# Altium PCB PCB_fishbotv0.1_2022-03-06.pcbdoc
Units mm, origin at the board's own origin, x right, y up, seen from the top; angles counter-clockwise.
Board outline 125.78 x 125.65 mm, 2 copper layers (Top Layer, Bottom Layer); 13 components, 46 nets, 98 pads, 24 vias.
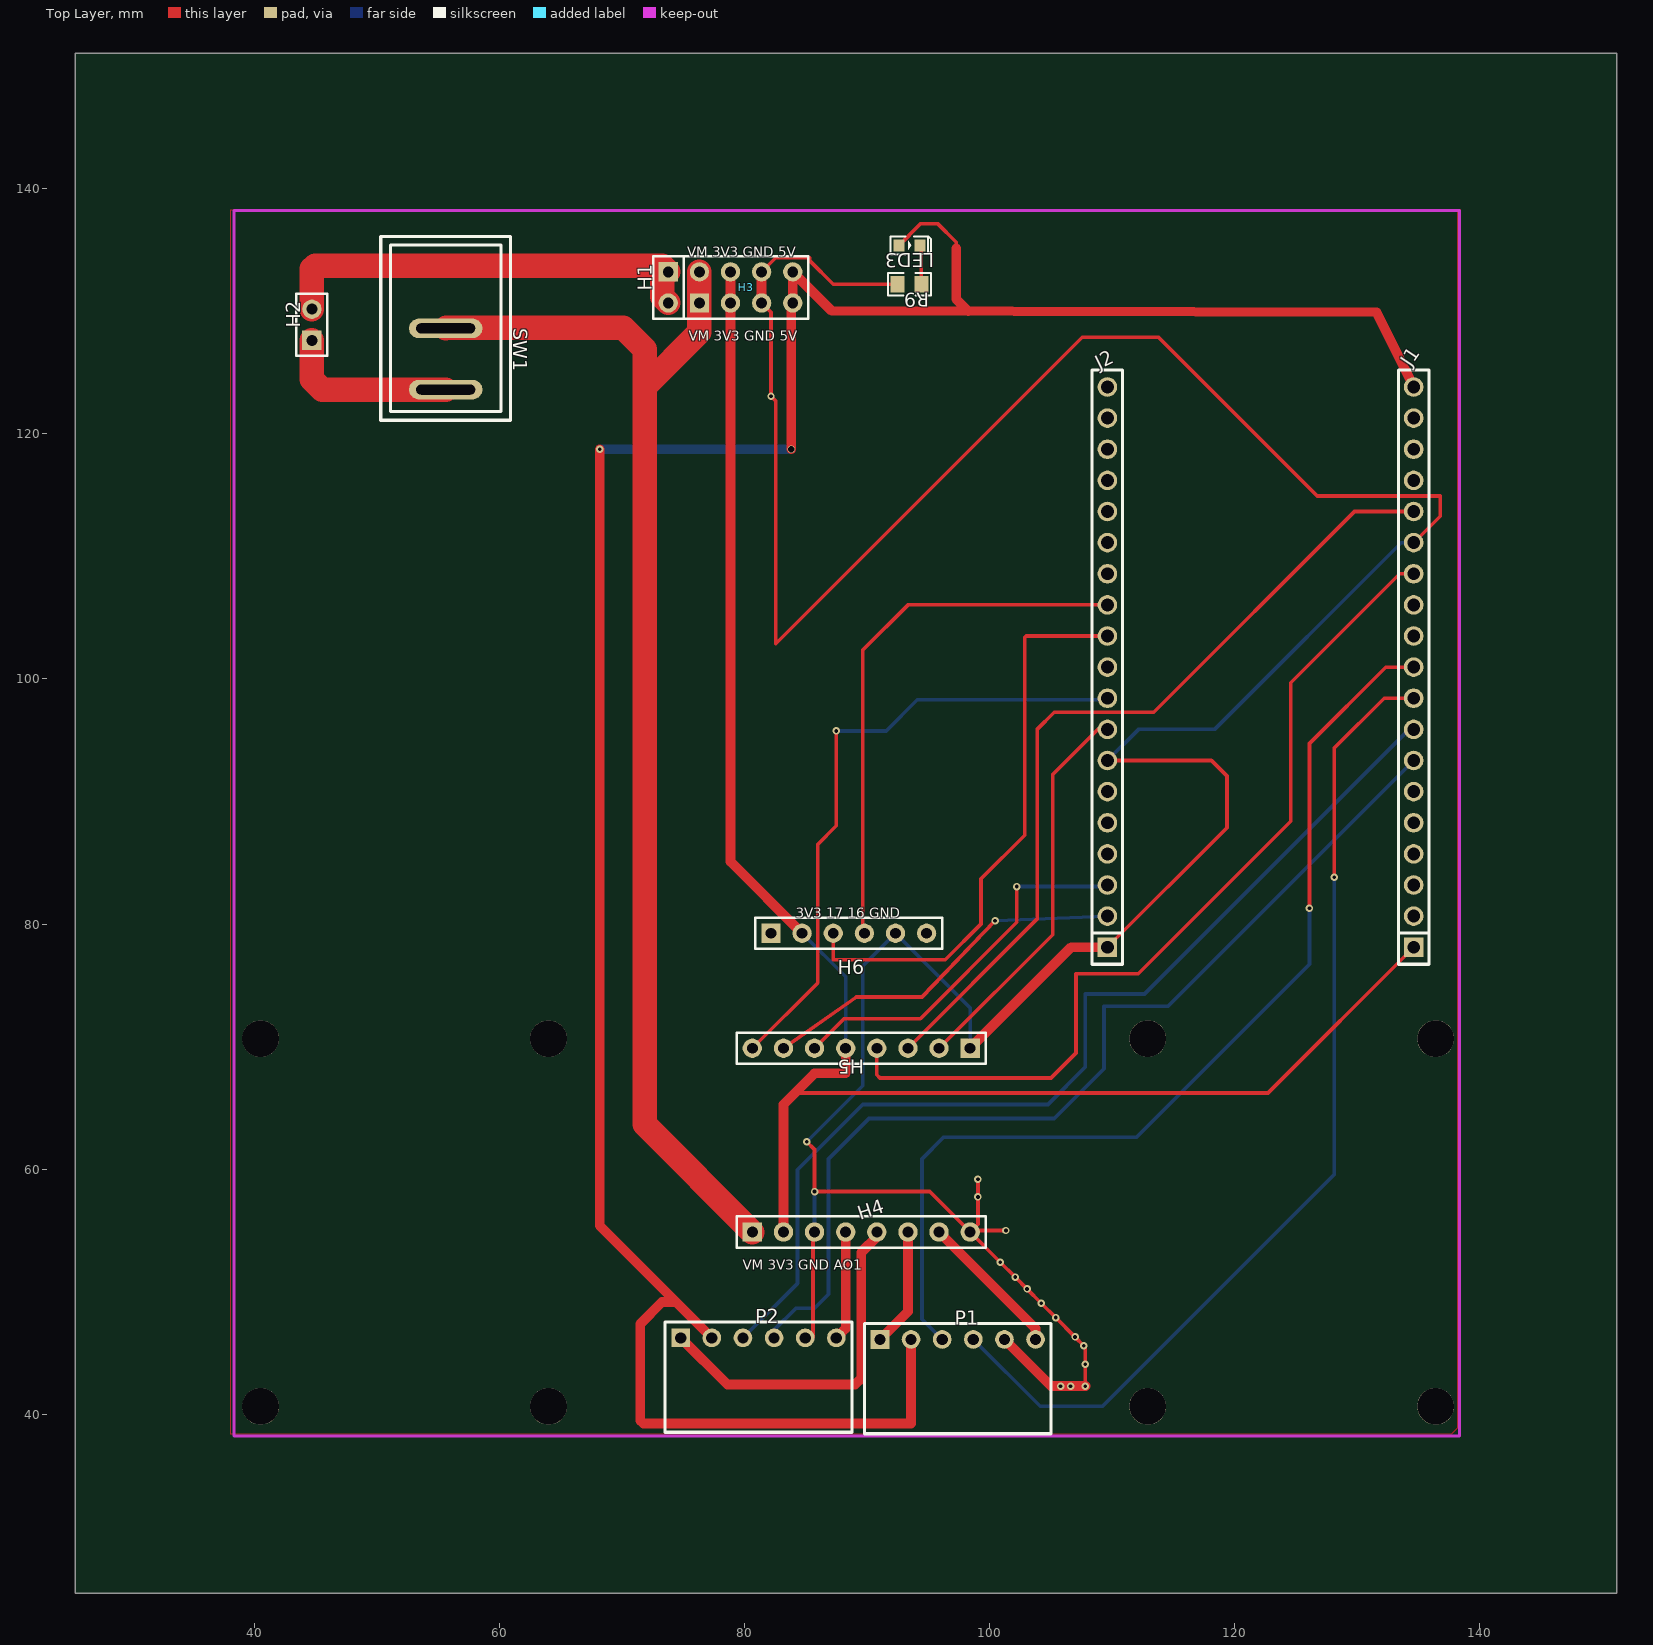
[diagram p0: Top Layer view]
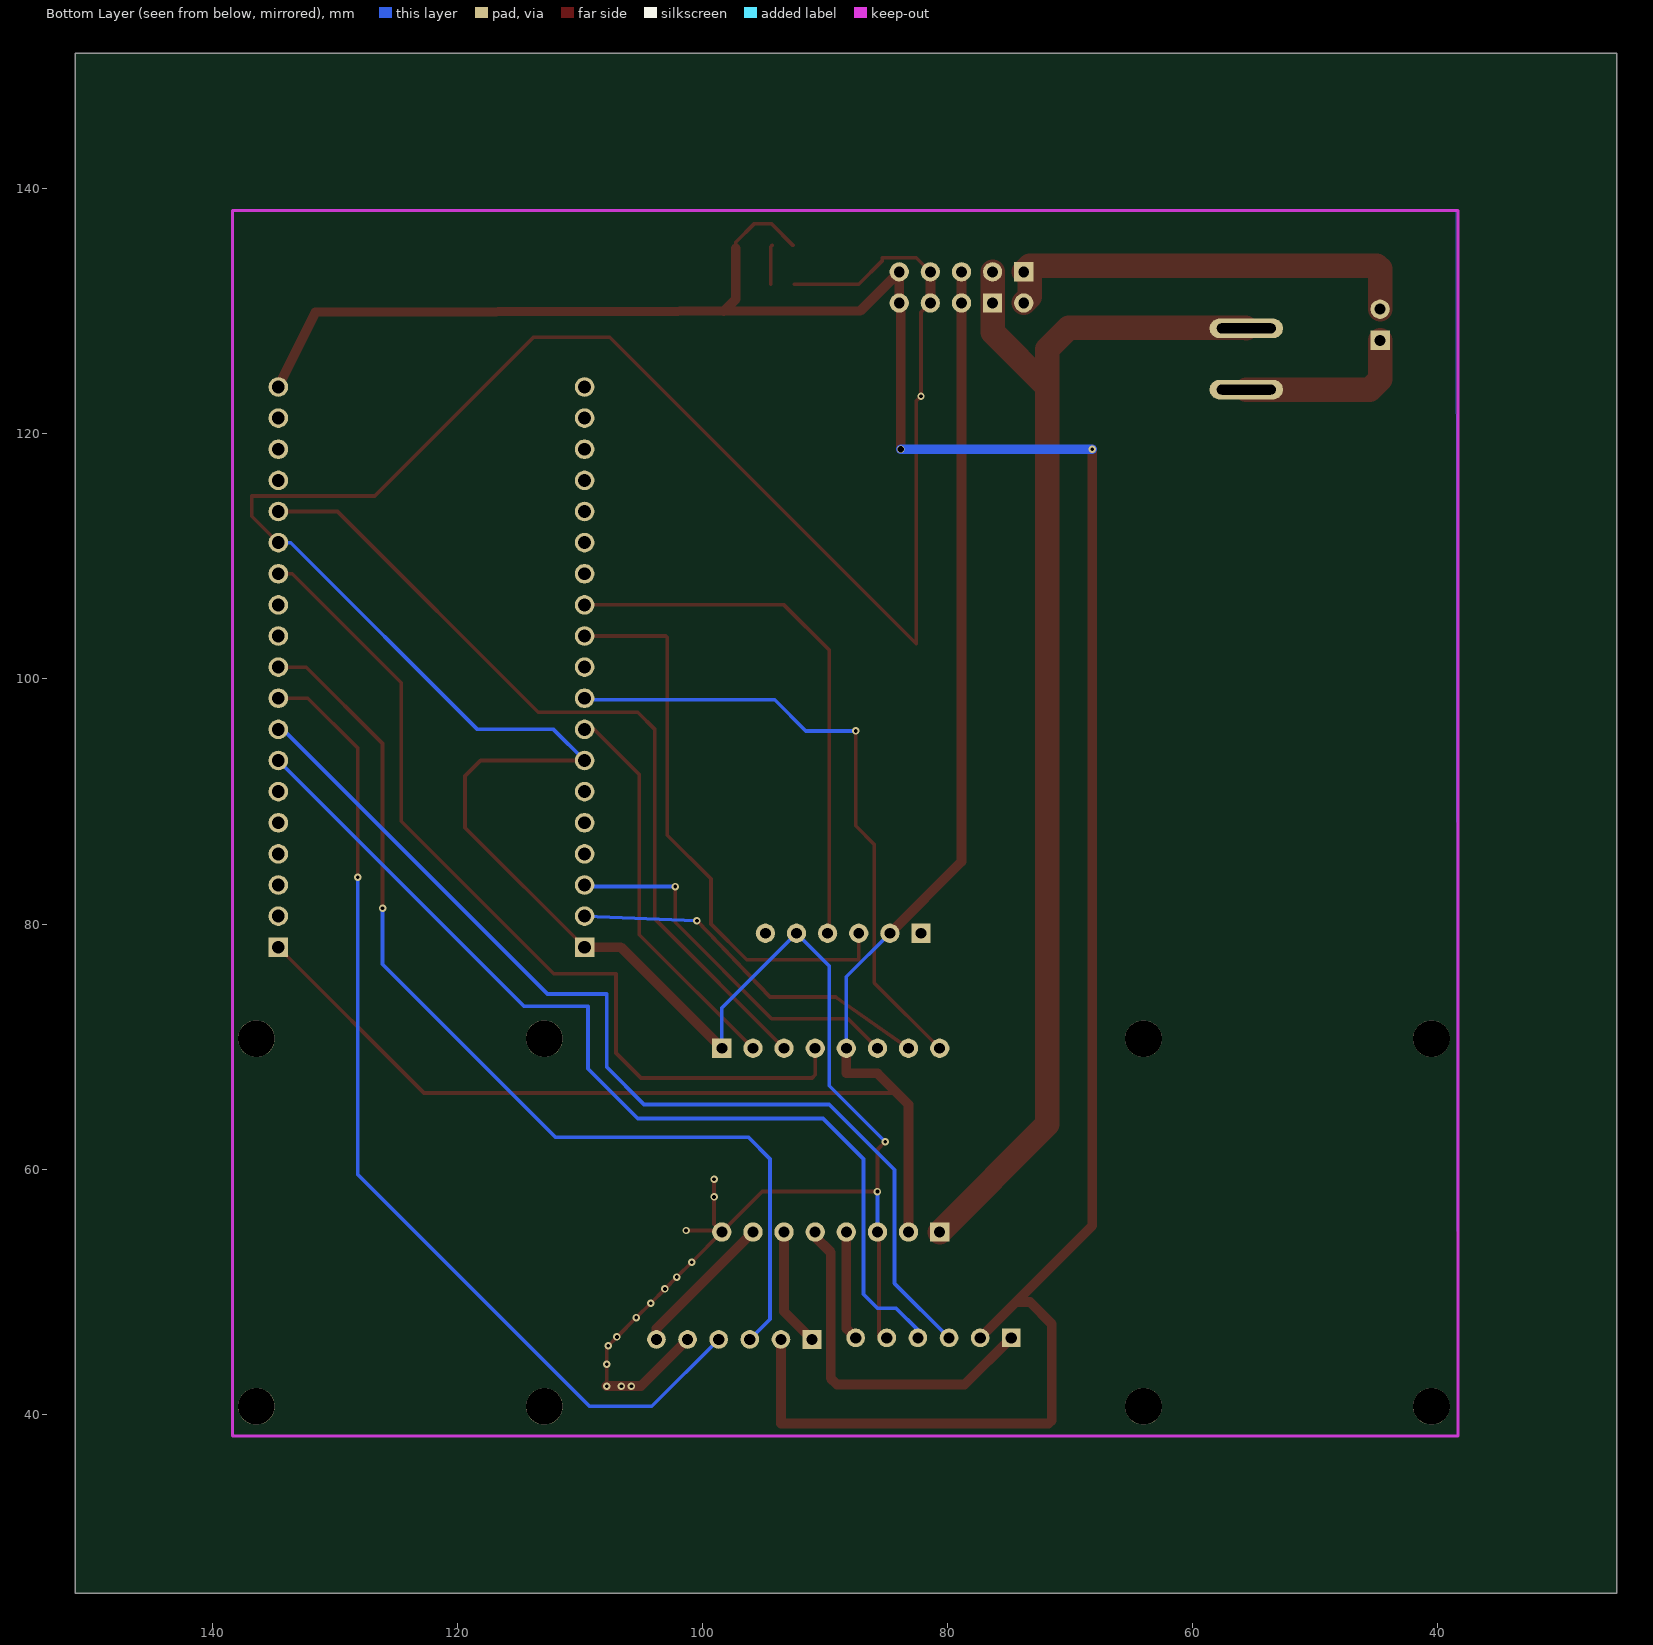
[diagram p1: Bottom Layer view, seen from below]

## Layer stack, top to bottom
Top Layer: signal copper (thickness not stored)
Dielectric: dielectric 0.32, FR-4, Dk 4.8
Bottom Layer: signal copper (thickness not stored)

## Board outline
151.181,25.4 25.4,25.4 25.4,151.054 151.181,151.054

## Components (designator, comment, footprint, x,y, rotation, side; value= is the part's Value field where it differs from the comment)
H1 "HDR-F-2.54_1x2" HDR-F-2.54_1X2 73.787,131.953 r270 top
H2 "PWR" HDR-F-2.54_1X2 44.704,128.905 r90 top
H3 "PWR1" HDR-F-2.54_2X4 80.137,131.953 r0 top
H4 "TB6612-LEFT" HDR-F-2.54_1X8 88.265,54.864 r0 top
H5 "TB6612-RIGHT" HDR-F-2.54_1X8 90.805,69.864 r180 top
H6 "IMU" HDR-F-2.54_1X6 87.249,79.248 r0 top
J1 "Header-Male-2.54_1x19" HDR-TH_19P-P2.54-V-M 134.62,100.965 r90 top
J2 "Header-Male-2.54_1x19" HDR-TH_19P-P2.54-V-M 109.62,100.965 r90 top
LED3 "LED-0603_R" LED0603_RED 93.472,135.382 r0 top
P1 "RIGHT" CONN-TH_6P-P2.54_2.54-6P 97.409,46.101 r0 top
P2 "LEFT" CONN-TH_6P-P2.54_2.54-6P 81.153,46.228 r0 top
R9 "1k" R0805 93.472,132.207 r180 top
SW1 "SS01-BBIWA-RA20-R" SW-TH_SS01-BBIWA-RA20-R 55.626,126.111 r270 top

## Footprints (in the part's own frame and the unit in brackets; to place one, negate y for a bottom-side part, rotate by r counter-clockwise, add the part's x,y. Pads: shape width x height; smd on the part's side, far side on the other; paste and mask are expansions set on the pad)
CONN-TH_6P-P2.54_2.54-6P [mil]
  rect 60x60 hole 36: 1(-250,0)
  round 60 hole 36: 2(-150,0) 3(-50,0) 4(50,0) 5(150,0) 6(250,0)
  silkscreen extent -300,-303 300,51
HDR-F-2.54_1X2 [mil]
  rect 62x62 hole 35: 1(-50,0)
  round 62 hole 35: 2(50,0)
  silkscreen extent -100,-49 100,50
HDR-F-2.54_1X6 [mil]
  rect 62x62 hole 35: 1(-200,0)
  round 62 hole 35: 2(-100,0) 3(0,0) 4(100,0) 5(200,0) 6(300,0)
  silkscreen extent -250,-50 350,50
HDR-F-2.54_1X8 [mil]
  rect 62x62 hole 35: 1(-300,0)
  round 62 hole 35: 2(-200,0) 3(-100,0) 4(0,0) 5(100,0) 6(200,0) 7(300,0) 8(400,0)
  silkscreen extent -350,-50 450,50
HDR-F-2.54_2X4 [mil]
  rect 62x62 hole 35: 1(-150,-50)
  round 62 hole 35: 2(-150,50) 3(-50,-50) 4(-50,50) 5(50,-50) 6(50,50) 7(150,-50) 8(150,50)
  silkscreen extent -200,-100 200,100
HDR-TH_19P-P2.54-V-M [mm]
  rect 1.6x1.6 hole 1.05: 1(-22.86,0)
  round 1.6 hole 1.05: 2(-20.32,0) 3(-17.78,0) 4(-15.24,0) 5(-12.7,0) 6(-10.16,0) 7(-7.62,0) 8(-5.08,0) 9(-2.54,0) 10(0,0) 11(2.54,0) 12(5.08,0) 13(7.62,0) 14(10.16,0) 15(12.7,0) 16(15.24,0) 17(17.78,0) 18(20.32,0) 19(22.86,0)
  silkscreen extent -24.25,-1.25 24.25,1.25
LED0603_RED [mm]
  rect 0.9x1 smd: 1(-0.85,0) 2(0.85,0)
  silkscreen extent -1.54,-0.73 1.75,0.73
R0805 [mm]
  rect 1.133x1.377 smd: 1(-0.966,0) 2(0.966,0)
  silkscreen extent -1.76,-0.92 1.76,0.92
SW-TH_SS01-BBIWA-RA20-R [mm]
  oval 1.6x6 hole 0.8 slot 4.8 at 90 deg: 1(2.5,0) 2(-2.5,0)
  silkscreen extent -10,-5.3 5,5.3

## Free pads (board coordinates)
  round 3 hole 3 unplated: ""(40.513,40.64) ""(40.513,70.64) ""(64.013,40.64) ""(64.013,70.64) ""(112.913,40.64) ""(112.913,70.64) ""(136.413,40.64) ""(136.413,70.64)

## Via types
v1: diameter 0.61, hole 0.305, Top Layer to Bottom Layer, 23 vias
v2: diameter 0.61, hole 0.5, Top Layer to Bottom Layer, 1 vias

## Nets (pads, with @x,y where several pads share a name; then routed paths per layer and width w, separated by ;. In a path a pad name is that pad's centre, name@x,y a point inside that pad or via, vN(x,y) a via of type N, cw(c..) or ccw(c..) an arc to the next point about the centre after c; other vN are vias at no path point)
3V3: H3.3 H3.4 H4.2 H5.5 H6.2 J1.1 | length 141.3
  Top Layer w0.3: 84.115,66.208 122.723,66.208 J1.1
  Top Layer w0.8: H3.4 H3.3 78.867,85.09 H6.2 ; H4.2 83.185,65.278 85.725,67.818 88.265,67.818 H5.5
  Bottom Layer w0.3: H6.2 88.265,75.692 H5.5
+5V: H3.7 H3.8 J1.19 LED3.1 P1.2 P2.2 | length 219
  Top Layer w0.3: LED3.1 94.4,137.16 95.758,137.16 97.282,135.636 97.282,135.128
  Top Layer w0.8: v1(68.199,118.745) 68.199,55.372 P2.2 74.422,49.149 73.279,49.149 71.501,47.371 71.501,39.497 71.755,39.243 93.599,39.243 P1.2 ; v2(83.82,118.745) 83.82,130.556 H3.7 H3.8 87.122,130.048 131.572,129.921 J1.19 ; 97.282,135.128 97.282,130.997 98.263,130.016
  Bottom Layer w0.8: v1(68.199,118.745) v2(83.82,118.745)
AO1: H4.4 P2.6 | length 9
  Top Layer w0.8: P2.6 88.265,46.99 H4.4
AO2: H4.5 P2.1 | length 29
  Top Layer w0.8: P2.1 78.613,42.418 89.027,42.418 89.535,42.926 89.535,53.213 90.805,54.483 H4.5
BO1: H4.7 P1.6 | length 12
  Top Layer w0.8: H4.7 103.759,46.99 P1.6
BO2: H4.6 P1.1 | length 9.7
  Top Layer w0.8: P1.1 93.345,48.387 H4.6
CLK: J2.19
CMD: J1.18
EN: J1.2
GND: H3.5 H3.6 H4.3 H4.8 H5.1 H6.5 J1.14 J2.1 J2.7 P1.5 P2.5 R9.2 | length 288.5
  Top Layer w0.3: H3.5 82.169,129.921 v1(82.169,123.063) 82.55,122.682 82.55,102.87 107.569,127.889 113.792,127.889 126.746,114.935 136.779,114.935 136.779,113.284 J1.14 ; H3.6 82.55,134.366 85.344,134.366 85.344,134.112 87.249,132.207 R9.2 ; P2.5 85.598,46.228 85.598,54.737 H4.3 ; v1(85.09,62.23) 85.725,61.595 v1(85.725,58.166) 95.123,58.166 H4.8 ; v1(99.06,59.182) v1(99.06,57.727) 99.06,55.499 H4.8 ; v1(101.346,54.991) 98.552,54.991 H4.8 ; v1(107.823,42.291) v1(107.823,44.07) 107.823,45.466 v1(107.697,45.592) v1(106.986,46.303) v1(105.407,47.882) 104.233,49.056 103.064,50.225 102.099,51.19 v1(100.886,52.403) H4.8 ; J2.1 119.38,87.865 119.38,92.075 118.11,93.345 J2.7
  Top Layer w0.8: H3.5 H3.6 ; H5.1 106.666,78.105 J2.1 ; P1.5 105.029,42.291 v1(105.801,42.291) v1(106.614,42.291) v1(107.823,42.291)
  Bottom Layer w0.3: v1(85.09,62.23) 89.662,66.802 89.662,76.581 H6.5 98.425,73.152 H5.1 ; H4.3 v1(85.725,58.166) ; J2.7 112.16,95.885 118.364,95.885 133.604,111.125 J1.14
  other v1: 104.233,49.056 103.064,50.225 102.099,51.19
H6_1: H6.1
H6_6: H6.6
IO0: J2.14
IO2: J2.15
IO4: J2.13
IO5: J2.10
IO12: H5.4 J1.13 | length 73.6
  Top Layer w0.3: H5.4 90.805,67.691 91.059,67.437 105.029,67.437 107.061,69.469 107.061,75.946 112.141,75.946 124.587,88.392 124.587,99.695 133.477,108.585 J1.13
IO13: H5.3 J1.15 | length 68.5
  Top Layer w0.3: H5.3 103.886,80.405 103.886,95.885 105.283,97.282 113.411,97.282 129.794,113.665 J1.15
IO14: J1.12
IO15: J2.16
IO16: H6.4 J2.12 | length 44.7
  Top Layer w0.3: H6.4 89.662,79.375 89.662,102.362 93.345,106.045 J2.12
IO17: H6.3 J2.11 | length 47.1
  Top Layer w0.3: H6.3 87.249,77.089 96.393,77.089 99.314,80.01 99.314,83.693 102.87,87.249 102.87,103.378 102.997,103.505 J2.11
IO18: H5.8 J2.9 | length 52
  Top Layer w0.3: H5.8 85.979,75.198 85.979,86.487 87.503,88.011 v1(87.503,95.758)
  Bottom Layer w0.3: v1(87.503,95.758) 91.567,95.758 94.107,98.298 109.493,98.298 J2.9
IO19: H5.2 J2.8 | length 32.2
  Top Layer w0.3: H5.2 105.156,79.135 105.156,92.202 108.839,95.885 J2.8
IO21: J2.6
IO22: H5.6 J2.3 | length 31.2
  Top Layer w0.3: H5.6 88.123,72.263 94.361,72.263 102.235,80.137 v1(102.235,83.058)
  Bottom Layer w0.3: v1(102.235,83.058) 109.62,83.058 J2.3
IO23: H5.7 J2.2 | length 30.4
  Top Layer w0.3: H5.7 89.154,74.041 94.488,74.041 v1(100.457,80.264)
  Bottom Layer w0.3: v1(100.457,80.264) J2.2
IO25: J1.9 P1.4 | length 82.5
  Top Layer w0.3: v1(128.143,83.82) 128.143,94.361 132.207,98.425 J1.9
  Bottom Layer w0.3: P1.4 104.14,40.64 109.22,40.64 128.143,59.563 v1(128.143,83.82)
IO26: J1.10 P1.3 | length 82.7
  Top Layer w0.3: v1(126.111,81.28) 126.111,94.742 132.334,100.965 J1.10
  Bottom Layer w0.3: P1.3 94.488,47.752 94.488,60.833 96.266,62.611 112.014,62.611 126.111,76.708 v1(126.111,81.28)
IO27: J1.11
IO32: J1.7 P2.4 | length 81.5
  Bottom Layer w0.3: P2.4 82.423,46.863 84.201,48.641 85.725,48.641 86.868,49.784 86.868,60.833 90.17,64.135 105.283,64.135 109.347,68.199 109.347,73.279 114.554,73.279 J1.7
IO33: J1.8 P2.3 | length 84.2
  Bottom Layer w0.3: P2.3 84.328,50.673 84.328,59.944 89.662,65.278 104.775,65.278 107.823,68.326 107.823,74.295 112.649,74.295 134.239,95.885 J1.8
IO34: J1.5
IO35: J1.6
R9_1: LED3.2 R9.1 | length 3.2
  Top Layer w0.3: LED3.2 94.438,135.266 R9.1
SD0: J2.18
SD1: J2.17
SD2: J1.16
SD3: J1.17
SVN: J1.4
SVP: J1.3
U0_RXD: J2.5
U0_TXD: J2.4
VGND: H1.1 H1.2 H2.2 | length 36
  Top Layer w2: H2.2 44.704,133.477 44.958,133.731 H1.1@73.279,133.731 ; H1.2 73.279,131.191 H1.1@73.279,133.731 ; H1.1 H1.1@73.279,133.731
VM: H3.1 H3.2 H4.1 SW1.2 | length 103.9
  Top Layer w2: SW1.2 55.666,128.651 70.104,128.651 71.854,126.901 71.854,123.825 ; H3.2 H3.1 76.327,128.298 71.854,123.825 ; H4.1 71.854,63.655 71.854,123.825
VMI: H2.1 SW1.1 | length 14.4
  Top Layer w2: H2.1 44.704,124.46 45.553,123.611 SW1.1

## Polygon pours and split planes (outlines as drawn)
GND on Bottom Layer (solid): 38.481,138.303 138.176,138.303 138.303,138.176 138.303,38.354 138.176,38.227 38.354,38.227
GND on Top Layer (solid): 38.1,138.303 138.43,138.303 138.176,138.049 138.176,38.862 137.668,38.354 38.1,38.354

## Silkscreen, mask and mechanical layers (free items; w line width, h text height)
Top Overlay:
  text "VM 3V3 GND 5V" at 75.343,134.47 h0.8
  text "VM 3V3 GND 5V" at 75.438,127.616 h0.8
  text "3V3 17 16 GND" at 84.201,80.499 h0.8
  text "VM 3V3 GND AO1" at 79.883,51.797 h0.8
Document:
  lines w0.003: 88.265,88.202 88.316,88.252